# EAGLE board frets-shift (EAGLE 6.6.0)
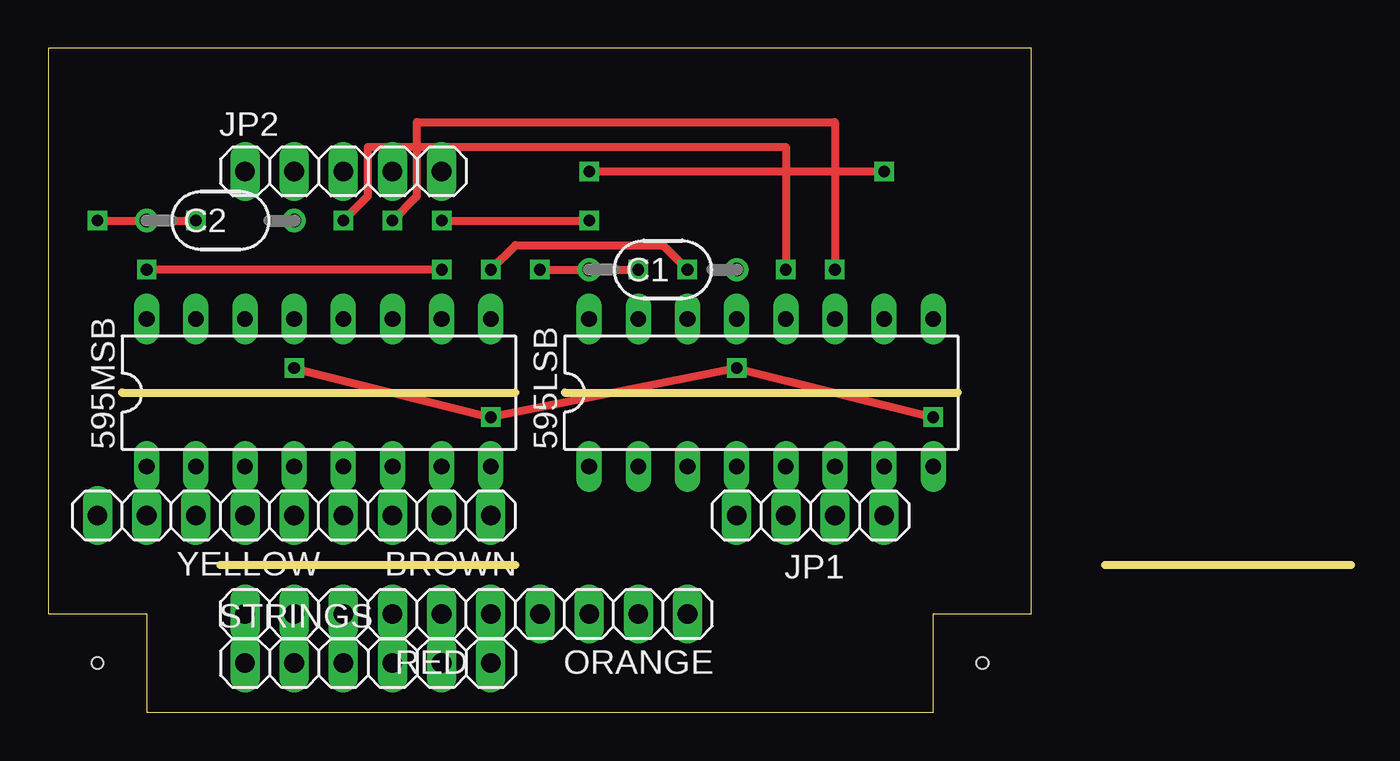
[diagram p0: board, top side]
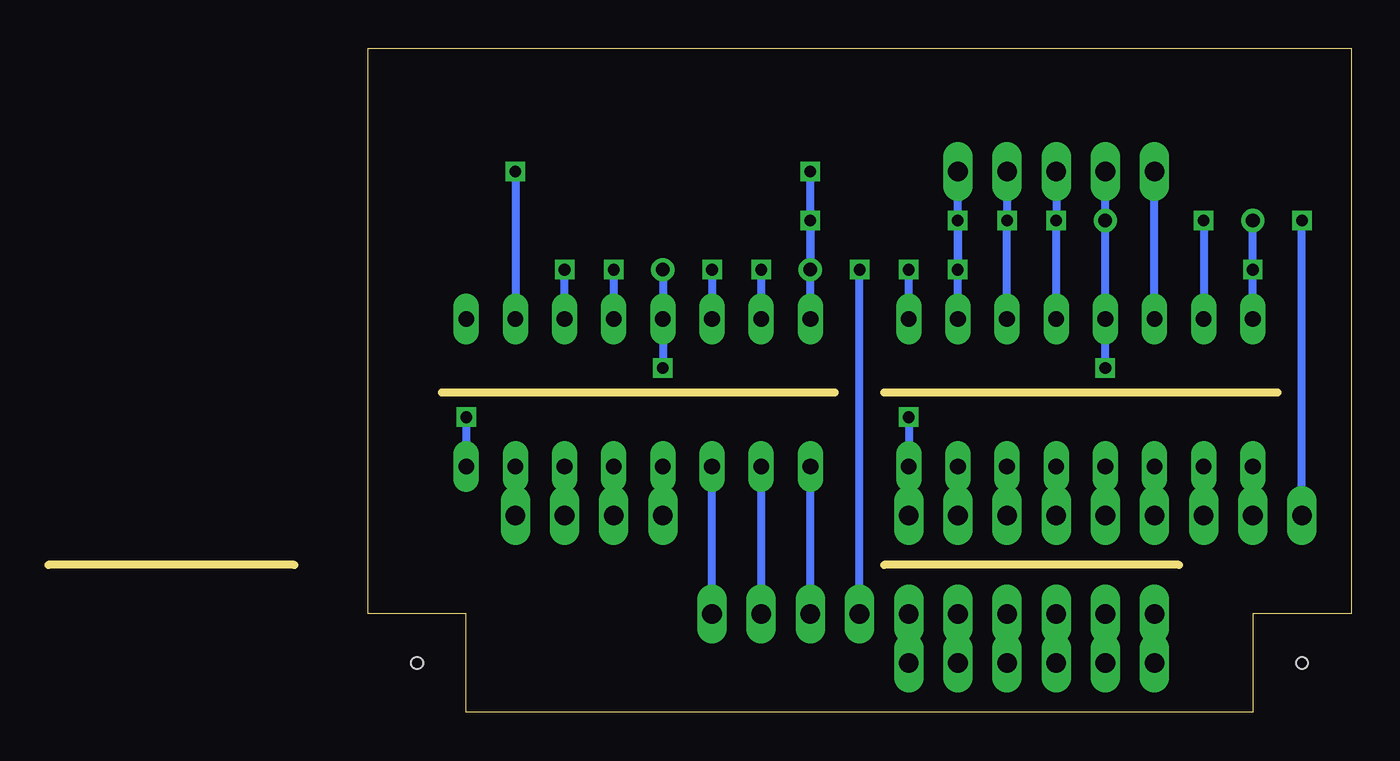
[diagram p1: board, bottom side, seen from below]

Size 67.31 x 34.29 mm. Coordinates in mm from the lower left corner, seen from the top.
Outline: 3.81,16.51 24.13,16.51
Outline: 26.67,16.51 46.99,16.51
Outline: 54.61,7.62 67.31,7.62
Outline: 8.89,7.62 24.13,7.62
Outline: 0,34.29 0,5.08 5.08,5.08 5.08,0 45.72,0 45.72,5.08 50.8,5.08 50.8,34.29 0,34.29
Copper layers (1*16): Top 0.035mm / dielectric 1.5mm / Bottom 0.035mm
Design rules "default": minimum track width 10mil, minimum drill 24mil, track to track 8mil, track to pad 8mil, pad to pad 8mil, via to via 8mil, smd to smd 8mil, copper to edge 40mil, drill to drill 8mil, minimum pad ring 10mil, minimum via ring 8mil, stop-mask expansion 4mil, vias tented up to drill 0mil, thermal gap 10mil
Holes 0.6 mm at 2.54,2.54 48.26,2.54

## Footprints (pad centres in the part's own frame; a part is rotated, then mirrored left to right if it is on the bottom)
DIL16 = drill 0.813 long: 1 -8.89,-3.81; 2 -6.35,-3.81; 3 -3.81,-3.81; 4 -1.27,-3.81; 5 1.27,-3.81; 6 3.81,-3.81; 7 6.35,-3.81; 8 8.89,-3.81; 9 8.89,3.81; 10 6.35,3.81; 11 3.81,3.81; 12 1.27,3.81; 13 -1.27,3.81; 14 -3.81,3.81; 15 -6.35,3.81; 16 -8.89,3.81
1X04 = drill 1.016 long: 1 -3.81,0; 2 -1.27,0; 3 1.27,0; 4 3.81,0
050X030_050_3 = drill 0.7: 1 -3.81,0; 2 3.81,0
1X05 = drill 1.016 long: 1 -5.08,0; 2 -2.54,0; 3 0,0; 4 2.54,0; 5 5.08,0
1X06 = drill 1.016 long: 1 -6.35,0; 2 -3.81,0; 3 -1.27,0; 4 1.27,0; 5 3.81,0; 6 6.35,0

## Placement (x,y rotation side)
595LSB  74LS595N  [DIL16]  36.83,16.51 0 top
595MSB  74LS595N  [DIL16]  13.97,16.51 0 top
BROWN  [1X04]  19.05,10.16 180 top
C1  100n  [050X030_050_3]  31.75,22.86 0 top
C2  100n  [050X030_050_3]  8.89,25.4 0 top
JP1  [1X04]  39.37,10.16 0 top
JP2  [1X05]  15.24,27.94 0 top
ORANGE  [1X05]  27.94,5.08 180 top
RED  [1X05]  15.24,5.08 180 top
STRINGS  [1X06]  16.51,2.54 0 top
YELLOW  [1X05]  7.62,10.16 180 top

## Library data of the parts
595LSB 595MSB = 74xx-us
BROWN JP1 JP2 ORANGE RED STRINGS YELLOW = pinhead
C1 C2 = gm-caps-ceramic

## Nets
D0: RED.5 STRINGS.1
D1: RED.4 STRINGS.2
D2: RED.3 STRINGS.3
D3: RED.2 STRINGS.4
D4: RED.1 STRINGS.5
D5: ORANGE.5 STRINGS.6
GND: 595LSB.8 595LSB.13 595MSB.8 595MSB.13 BROWN.1 C1.2 C2.2 JP2.2
MX_A: 595LSB.5 JP1.2
MX_B: 595LSB.6 JP1.3
MX_C: 595LSB.7 JP1.4
N$1: 595LSB.14 595MSB.9
ORNG: 595LSB.4 JP1.1
RCK: 595LSB.12 595MSB.12 JP2.3
SCK: 595LSB.11 595MSB.11 JP2.4
SER: 595MSB.14 JP2.1
SR4: 595LSB.3 ORANGE.1
SR5: 595LSB.2 ORANGE.2
SR6: 595LSB.1 ORANGE.3
SR7: 595LSB.15 ORANGE.4
SR8: 595MSB.7 BROWN.2
SR9: 595MSB.6 BROWN.3
SR10: 595MSB.5 BROWN.4
SR11: 595MSB.4 YELLOW.1
SR12: 595MSB.3 YELLOW.2
SR13: 595MSB.2 YELLOW.3
SR14: 595MSB.1 YELLOW.4
SR15: 595MSB.15 YELLOW.5
VA: 595LSB.10 595LSB.16 595MSB.10 595MSB.16 C1.1 C2.1 JP2.5

## Tracks (layer width: path | path; a pad name or v marks a point on that pad's centre or on a via)
D0
  Bottom 0.406: RED.5 STRINGS.1
D1
  Bottom 0.406: RED.4 STRINGS.2
D2
  Bottom 0.406: RED.3 STRINGS.3
D3
  Bottom 0.406: RED.2 STRINGS.4
D4
  Bottom 0.406: RED.1 STRINGS.5
D5
  Bottom 0.406: ORANGE.5 STRINGS.6
GND  (via drill 0.6)
  Top 0.406: v45.72,15.24 v35.56,17.78 v22.86,15.24 v12.7,17.78
  Bottom 0.406: BROWN.1 595MSB.8 v22.86,15.24 | C1.2 595LSB.13 v35.56,17.78 | v45.72,15.24 595LSB.8 | JP2.2 C2.2 595MSB.13 v12.7,17.78
MX_A
  Bottom 0.406: 595LSB.5 JP1.2
MX_B
  Bottom 0.406: 595LSB.6 JP1.3
MX_C
  Bottom 0.406: 595LSB.7 JP1.4
N$1  (via drill 0.6)
  Top 0.406: v22.86,22.86 24.13,24.13 31.75,24.13 v33.02,22.86
  Bottom 0.406: 595MSB.9 v22.86,22.86 | v33.02,22.86 595LSB.14
ORNG
  Bottom 0.406: JP1.1 595LSB.4
RCK  (via drill 0.6)
  Top 0.406: v15.24,25.4 16.51,26.67 16.51,29.21 38.1,29.21 v38.1,22.86
  Bottom 0.406: 595MSB.12 v15.24,25.4 JP2.3 | v38.1,22.86 595LSB.12
SCK  (via drill 0.6)
  Top 0.406: v17.78,25.4 19.05,26.67 19.05,30.48 40.64,30.48 v40.64,22.86
  Bottom 0.406: 595MSB.11 v17.78,25.4 JP2.4 | 595LSB.11 v40.64,22.86
SER
  Bottom 0.406: 595MSB.14 JP2.1
SR4
  Bottom 0.406: ORANGE.1 595LSB.3
SR5
  Bottom 0.406: 595LSB.2 ORANGE.2
SR6
  Bottom 0.406: ORANGE.3 595LSB.1
SR7  (via drill 0.6)
  Top 0.406: v25.4,22.86 v30.48,22.86
  Bottom 0.406: ORANGE.4 v25.4,22.86 | v30.48,22.86 595LSB.15
SR8
  Bottom 0.406: 595MSB.7 BROWN.2
SR9
  Bottom 0.406: 595MSB.6 BROWN.3
SR10
  Bottom 0.406: BROWN.4 595MSB.5
SR11
  Bottom 0.406: YELLOW.1 595MSB.4
SR12
  Bottom 0.406: YELLOW.2 595MSB.3
SR13
  Bottom 0.406: 595MSB.2 YELLOW.3
SR14
  Bottom 0.406: YELLOW.4 595MSB.1
SR15  (via drill 0.6)
  Top 0.406: v2.54,25.4 v7.62,25.4
  Bottom 0.406: YELLOW.5 v2.54,25.4 | v7.62,25.4 595MSB.15
VA  (via drill 0.6)
  Top 0.406: v20.32,25.4 v27.94,25.4 | v20.32,22.86 v5.08,22.86 | v27.94,27.94 v43.18,27.94
  Bottom 0.406: 595MSB.16 C2.1 v5.08,22.86 | 595LSB.16 v27.94,25.4 | v27.94,25.4 C1.1 | v20.32,25.4 JP2.5 | 595MSB.10 v20.32,25.4 | v43.18,27.94 595LSB.10 | v20.32,25.4 v20.32,22.86 | v27.94,25.4 v27.94,27.94